# Altium PCB CellVoltageControl.PcbDoc (part 3 of 3)
Units mm, origin at the board's own origin, x right, y up, seen from the top; angles counter-clockwise.
Board outline 100.01 x 50.02 mm, 2 copper layers (Top Layer, Bottom Layer); 246 components, 111 nets, 654 pads, 146 vias.
Unrouted connection lines stored in the file: 464.
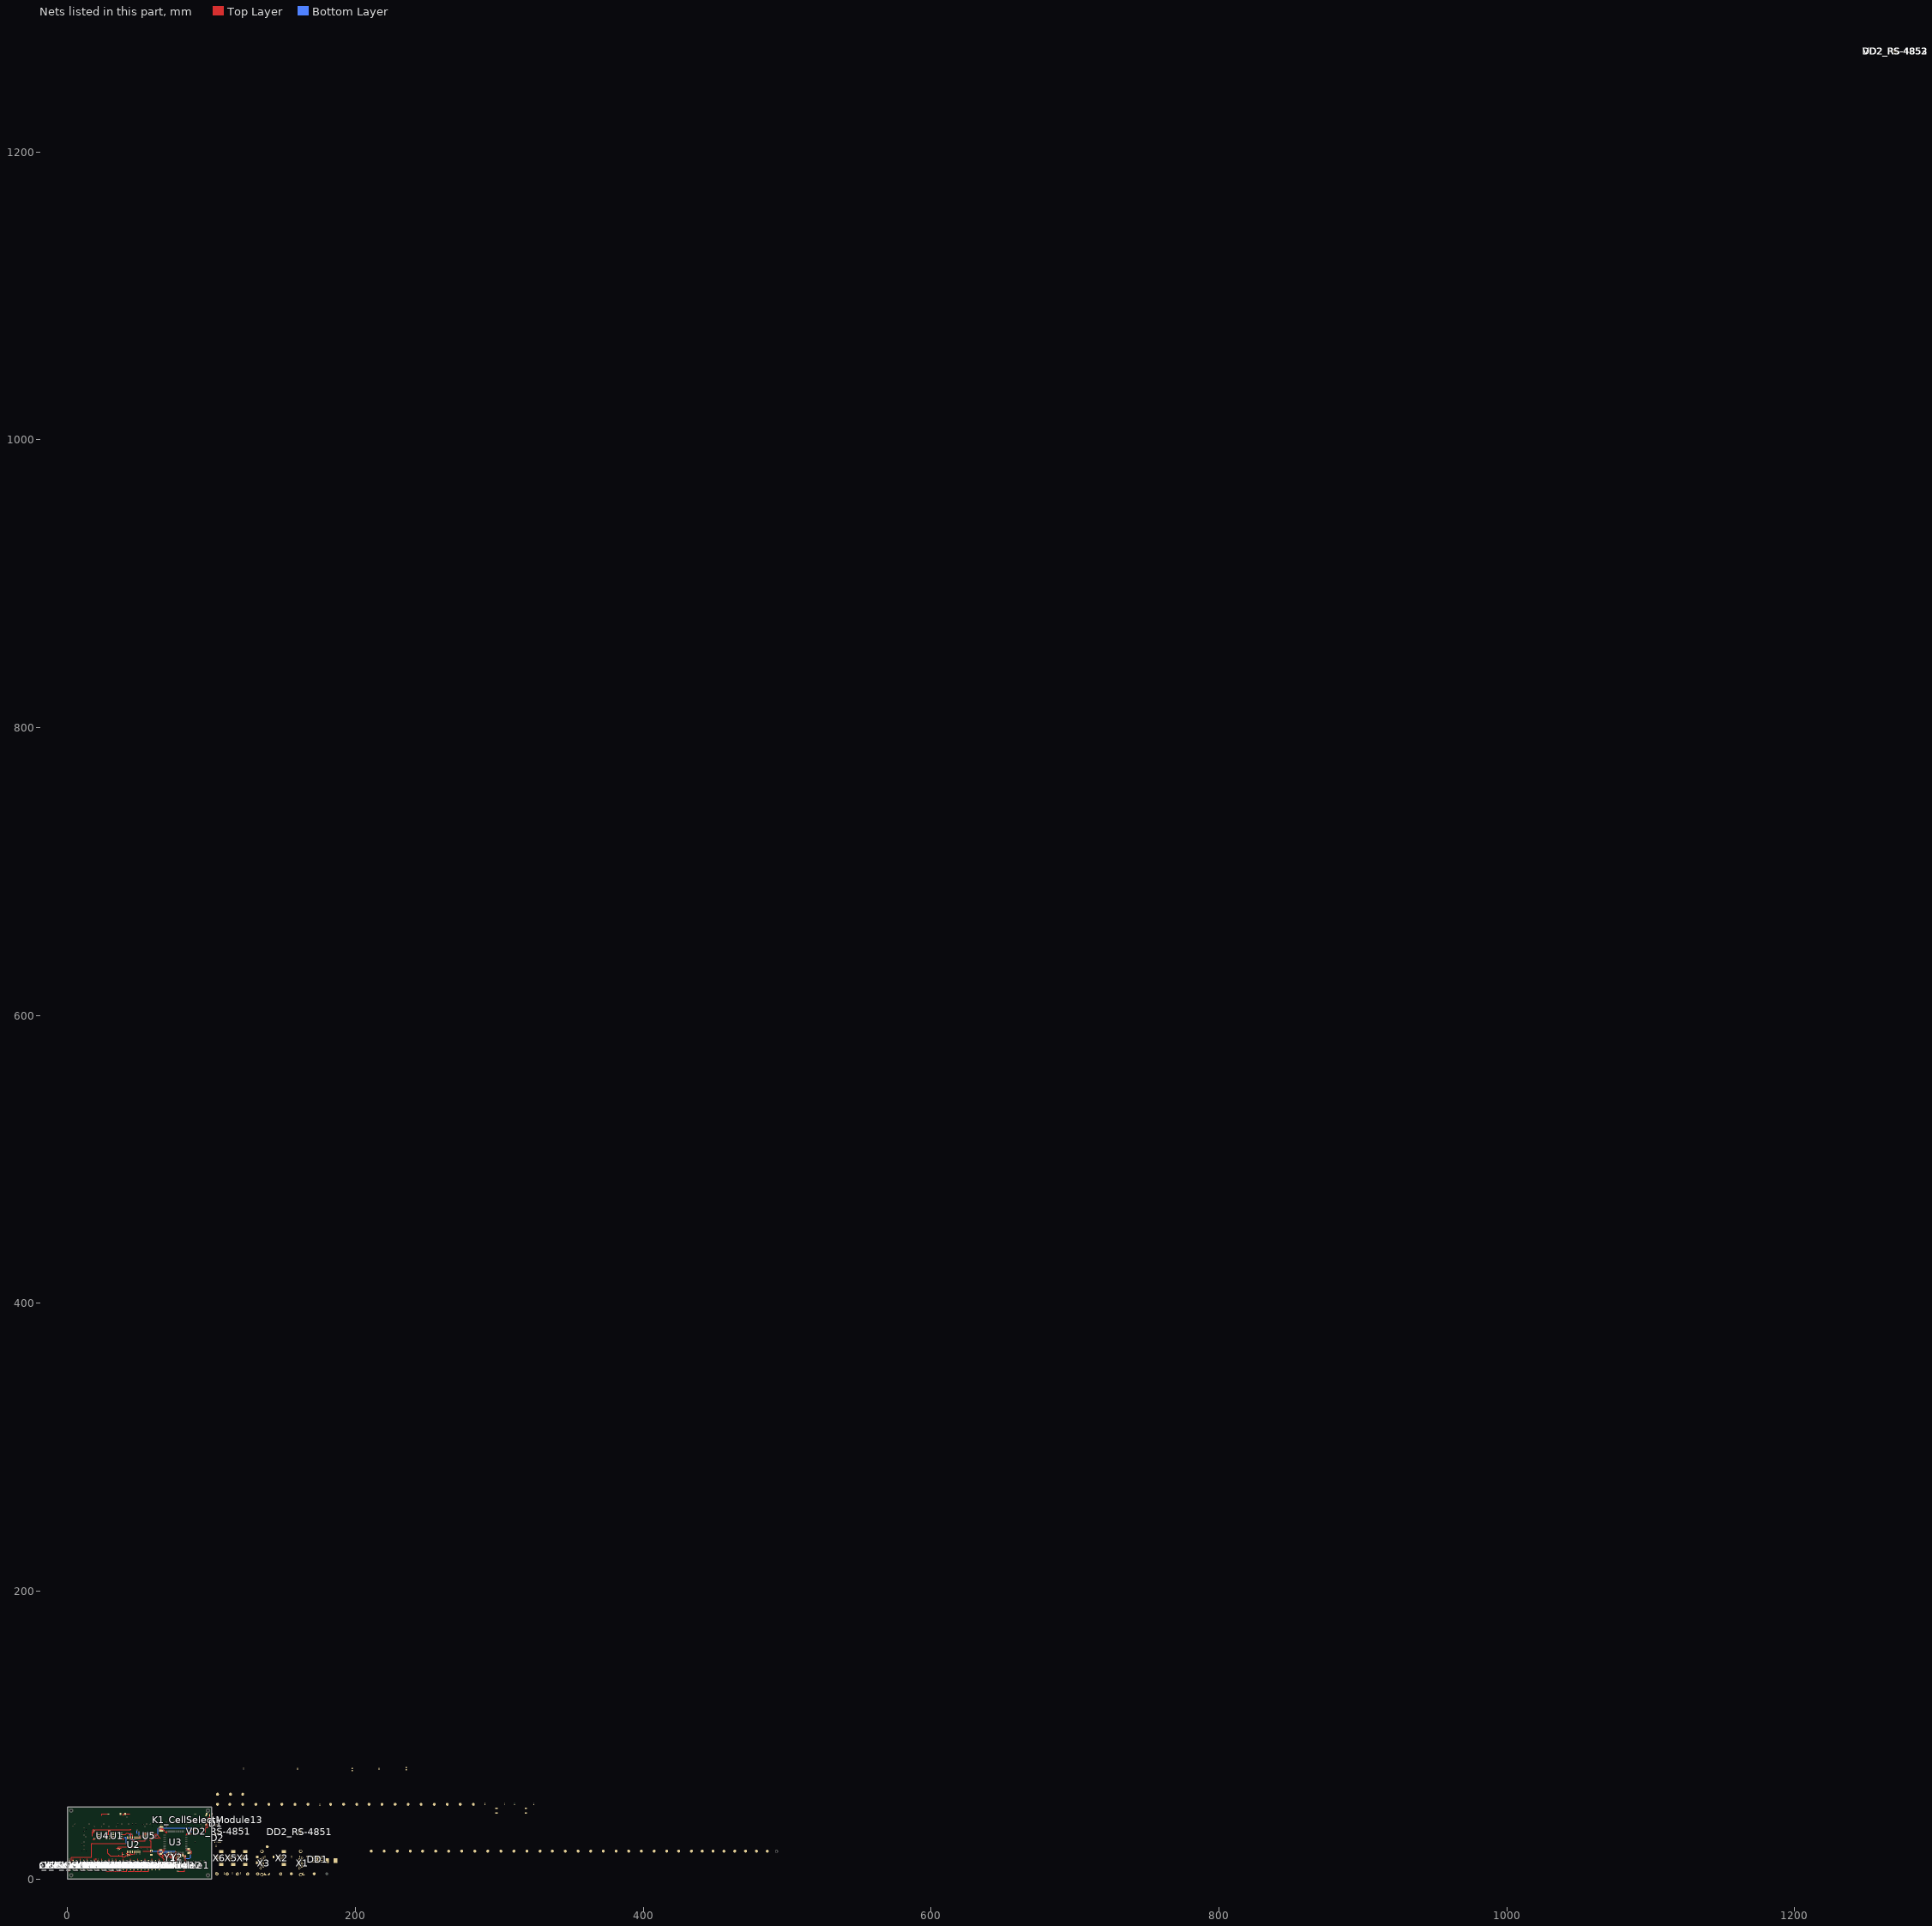
[diagram p2: the nets of this part, all layers, seen from the top]

## Via types
v1: diameter 0.61, hole 0.305, Top Layer to Bottom Layer, tented both sides, 128 vias
v2: diameter 0.6, hole 0.3, Top Layer to Bottom Layer, 18 vias

## Nets (pads, with @x,y where several pads share a name; then routed paths per layer and width w, separated by ;. In a path a pad name is that pad's centre, name@x,y a point inside that pad or via, vN(x,y) a via of type N, cw(c..) or ccw(c..) an arc to the next point about the centre after c; other vN are vias at no path point) (continued)
5V: C4.1 C5.1 C12.1 C13.1 C18.1 C19.1 D1.1 D1.3 FP2.1 L1.2 R8.1 R18.1 TP10.1 U2.1 U2.3 U2.4 | length 27.3
  Top Layer w0.2: 27.94,20.701 27.94,18.161 27.94,17.907 29.858,15.989 35.687,15.989 ; 35.687,16.637 35.687,15.989 ; 38.111,18.442 38.173,18.38 38.173,15.989 ; U2.3@43.919,18.874 43.919,17.145 ; 45.239,17.145 43.919,17.145 ; 35.687,15.989 38.173,15.989 ; 38.173,15.989 38.173,15.397 38.29,15.279 39.917,15.279 40.815,16.177 41.529,16.177 42.085,16.177 42.279,16.371 42.609,16.371 42.672,16.434 43.458,16.434 43.919,16.895 43.919,17.145
24V: C9.1 C10.1 C11.1 DD1.2 FP3.1 R7.1 TP13.1 X1.6 X3.6
cCell-1: R26_CellSelectModule13.1 R26_CellSelectModule14.1 TP15.1
cCell-2: R26_CellSelectModule11.1 R26_CellSelectModule12.1 TP12.1
cCell-3: R26_CellSelectModule9.1 R26_CellSelectModule10.1 TP11.1
cCell-4: R26_CellSelectModule7.1 R26_CellSelectModule8.1 TP8.1 | length 66.7
  Top Layer w0.2: 19.382,13.905 19.507,13.877 19.695,13.877 cw(c19.695,13.677) 19.836,13.819 19.881,13.774 cw(c19.739,13.633) 19.939,13.633 19.939,10.268 ccw(c20.139,10.268) 20.139,10.068 66.735,10.068 ccw(c66.734,10.268) 66.934,10.268 66.934,13.394 ccw(c66.734,13.394) 66.875,13.536 62.927,17.484 62.927,19.483 63.891,20.447 66.705,20.447 66.71,20.442 67.11,20.442 67.115,20.447
cCell-5: R26_CellSelectModule5.1 R26_CellSelectModule6.1 TP6.1
cCell-6: R26_CellSelectModule3.1 R26_CellSelectModule4.1 TP4.1
cCell-7: R26_CellSelectModule1.1 R26_CellSelectModule2.1 TP2.1 U5.3 | length 6.5
  Top Layer w0.2: U5.3@59.249,30.544 60.218,30.544 60.627,30.953 60.778,30.953 60.903,31.078 61.505,31.078 64.325,28.258
Cell-1: R25_CellSelectModule12.2 R25_CellSelectModule13.2 TP27.1 TP41_CellSelectModule12.1 TP41_CellSelectModule13.1 X6.3
Cell-2: R25_CellSelectModule10.2 R25_CellSelectModule11.2 TP26.1 TP41_CellSelectModule10.1 TP41_CellSelectModule11.1 X6.2
Cell-3: R25_CellSelectModule8.2 R25_CellSelectModule9.2 TP25.1 TP41_CellSelectModule8.1 TP41_CellSelectModule9.1 X6.1
Cell-4: R25_CellSelectModule6.2 R25_CellSelectModule7.2 TP24.1 TP41_CellSelectModule6.1 TP41_CellSelectModule7.1 X5.4
Cell-5: R25_CellSelectModule4.2 R25_CellSelectModule5.2 TP23.1 TP41_CellSelectModule4.1 TP41_CellSelectModule5.1 X5.3
Cell-6: R25_CellSelectModule2.2 R25_CellSelectModule3.2 TP22.1 TP41_CellSelectModule2.1 TP41_CellSelectModule3.1 X5.2
Cell-7: R25_CellSelectModule1.2 TP21.1 TP41_CellSelectModule1.1 X5.1
Cell-GND: R25_CellSelectModule14.2 TP28.1 TP41_CellSelectModule14.1 X6.4
FB: DD1.5 R8.2 R12.1
GND: C1.2 C2.2 C4.2 C5.2 C6.2 C7.2 C9.2 C10.2 C11.2 C12.2 C13.2 C14.1 C15.2 C16.2 C18.2 C19.2 C28_RS-4851.2 C28_RS-4852.2 C28_RS-4853.2 C29.2 C30.2 D1.2 D2.4 DD1.7 DD1.9 DD2_RS-4851.5 DD2_RS-4851.9 DD2_RS-4852.5 DD2_RS-4852.9 DD2_RS-4853.5 DD2_RS-4853.9 FP5.1 FP6.1 FP7.1 FP8.1 K1_CellSelectModule1.2 K1_CellSelectModule2.2 K1_CellSelectModule3.2 K1_CellSelectModule4.2 K1_CellSelectModule5.2 K1_CellSelectModule6.2 K1_CellSelectModule7.2 K1_CellSelectModule8.2 K1_CellSelectModule9.2 K1_CellSelectModule10.2 K1_CellSelectModule11.2 K1_CellSelectModule12.2 K1_CellSelectModule13.2 K1_CellSelectModule14.2 PB1.1 PB2.1 R3.2 R4.2 R10.2 R11.2 R12.2 R22_RS-4851.2 R22_RS-4852.2 R22_RS-4853.2 R24_RS-4851.2 R24_RS-4852.2 R24_RS-4853.2 R32.1 R33.1 TP17.1 TP36.1 TP37.1 U2.2 U2.6 U2.7 U2.8 VD1.AN VD2_RS-4851.3 VD2_RS-4852.3 VD2_RS-4853.3 X1.3 X2.4 X2.MP X3.3 X4.4 X4.MP Y1.2 Y2.1 Y2.4 | length 33.7
  Top Layer w0.2: 38.72,44.021 38.72,45.15 43.07,45.15 ; 40.783,17.634 v1(42.152,17.634) ; 41.529,17.572 41.529,17.097 41.532,17.094 42.102,17.094 ; v1@42.073,17.555 v1(42.152,17.634) ; U2.2@42.649,18.874 42.661,18.863 42.661,17.653 ; 64.567,35.364 64.642,35.364 64.932,35.074 65.765,35.074 65.655,35.184 65.655,35.536 C1.2@65.514,35.677 ; v1(72.517,15.113) 73.037,15.113 73.058,15.092 73.058,16.196 73.23,16.368 73.25,16.368 73.326,16.444 73.326,16.728 73.43,16.832 73.43,17.907 ; C12.2@76.7,15.706 77.394,15.706 77.73,15.37 77.73,15.346 77.986,15.09 78.01,15.09 78.228,15.309 78.228,15.721 78.283,15.775 78.283,16.285 ; C12.2@76.708,15.714 76.708,16.224 76.931,16.447 v1(76.931,16.558) 77.042,16.558 77.315,16.285 78.283,16.285 ; R33.1@76.83,5.26 81.18,5.26 81.18,6.444 ; 78.43,17.907 78.43,16.832 78.359,16.761 78.359,16.361 78.283,16.285 ; C19.2@81.777,16.256 81.777,16.216 81.798,16.216 81.915,16.099 81.915,15.363 82.106,15.172 ; 82.455,30.932 82.465,30.942 83.527,30.942 83.624,31.039 84.074,31.039 85.051,31.039 85.196,30.894 85.271,30.894 ; 42.102,17.094 42.672,17.094 42.661,17.105 42.661,17.653 ; 42.102,17.094 42.152,17.144 v1(42.152,17.634) ; v1(42.152,17.634) 42.641,17.634 42.661,17.653
  other v1: 1.151,11.04 86.152,11.06 91.186,11.049 71.189,11.141 22.484,12.433 27.462,12.423 42.404,12.433 54.924,12.453 57.307,12.443 72.34,12.453 80.01,12.446 87.343,12.453 92.452,12.443 12.358,12.464 17.315,12.464 37.477,12.474 39.951,12.464 47.483,12.464 49.815,12.474 52.44,12.474 59.901,12.474 62.335,12.474 94.946,12.464 7.289,12.504 32.389,12.494 44.929,12.494 69.887,12.514 82.684,13.31 77.037,13.371 1.11,13.766 21.192,13.857 31.187,13.857 11.186,13.917 50.269,17.271 47.748,17.355 9.881,19.396 12.786,19.406 42.579,20.485 11.344,20.595 48.967,20.601 50.919,20.727 55.375,20.737 11.386,22.974 9.839,24.342 88.646,25.527 11.303,25.654 12.592,29.32 88.646,30.48 11.334,30.509 87.249,31.75 11.281,33.182 12.797,34.361 11.334,35.477 33.667,36.408 23.659,36.429 53.693,36.411 28.755,36.439 18.706,36.51 68.734,36.494 63.703,36.578 3.695,36.592 93.74,36.599 58.672,36.692 83.728,36.725 88.681,36.756 62.414,37.95 52.373,37.981 25.004,37.998 14.956,38.029 42.425,38.033 44.951,38.023 47.477,38.023 55.013,38.033 57.425,38.012 64.951,38.033 82.44,38.034 87.449,38.014 92.456,38.031 4.979,38.039 34.982,38.039 37.529,38.039 73.728,39.393 93.723,39.411 68.734,39.499 73.66,40.386
  other v2: 172.959,12.289 174.259,12.289 172.959,13.589 174.259,13.589 172.959,14.889 174.259,14.889 161.163,32.266 160.263,32.766 162.063,32.766 161.163,33.266
HSE: TP58.1 U5.6 Y1.3 | length 2.5
  Top Layer w0.2: 74.93,17.907 74.93,16.526 75.7,15.756 75.7,15.706
I2C_SCL: TP53.1
I2C_SDA: TP52.1
ISO_5V: C3.1 C17.1 C20.1 C21.1 C22.1 C23.1 D2.7 R14.2 R16.2 TP39.1 U1.3 U2.14 U3.7 U4.3 U4.4 | length 72.2
  Top Layer w0.2: 17.275,31.862 17.275,32.514 cw(c17.475,32.514) 17.334,32.655 17.516,32.837 ccw(c17.375,32.979) 17.575,32.979 17.575,33.884 cw(c17.775,33.884) 17.775,34.084 28.663,34.084 ; 17.278,29.758 17.278,31.859 ; U4.4@21.606,28.194 21.612,27.969 ccw(c21.806,28.014) 21.665,27.873 22.151,27.387 ; 27.256,30.734 27.327,30.804 28.47,30.804 ccw(c28.47,31.004) 28.67,31.004 C21.1@28.67,33.305 ; C21.1@28.663,33.312 28.663,33.386 28.663,34.084 ; U1.3@36.76,30.734 40.069,30.734 41.1,31.765 41.552,31.765 41.593,31.806 41.627,31.773 42.086,31.773 42.343,31.515 42.697,31.515 42.736,31.476 42.754,31.459 43.914,31.459 ; 43.914,31.75 43.914,31.459 ; 43.932,34.423 43.934,34.422 ccw(c44.081,34.286) 43.918,34.402 cw(c43.302,34.839) 43.305,34.084 28.663,34.084 ; v1(51.581,29.759) 51.599,29.776 52.104,29.776 ; 52.104,29.274 52.104,29.776 ; 52.104,30.278 52.104,29.776 ; v1(55.118,28.067) 55.055,28.004 53.849,28.004 53.882,27.971 53.882,26.42 45.599,26.42 43.919,28.099 U2.14@43.919,28.624 43.919,30.001 43.914,30.007 43.914,31.459 ; 69.413,13.905 69.413,14.422 71.93,16.939 U3.7@71.93,17.907
  Bottom Layer w0.2: v1(51.581,29.759) 51.581,29.743 53.257,28.067 v1(55.118,28.067)
ISO_GND: C3.2 C17.2 C20.2 C21.2 C22.2 C23.2 C24.2 C25.2 C26.2 C27.2 D2.5 R17.2 TP32.1 TP33.1 TP34.1 TP35.1 U1.7 U2.9 U2.10 U2.11 U2.12 U2.15 U2.16 U3.4 U4.2 X5.MP X6.MP | length 30.3
  Top Layer w0.2: 17.853,27.359 18.025,27.53 18.317,27.53 ; 18.228,31.859 18.228,32.286 18.431,32.489 18.431,33.401 ; 18.258,28.143 18.258,27.672 ccw(c18.458,27.672) 18.317,27.53 ; 18.498,27.349 18.317,27.53 ; 18.498,27.349 cw(c18.356,27.208) 18.556,27.208 18.556,27 ; 29.346,30.347 29.698,30.347 cw(c29.698,30.147) 29.839,30.289 30.605,29.522 ccw(c30.747,29.664) 30.747,29.464 U1.7@31.86,29.464 ; U2.16@41.379,28.624 U2.15@42.649,28.624 ; U2.12@46.459,28.624 U2.11@47.729,28.624 U2.10@48.999,28.624 U2.9@50.269,28.624 ; 50.175,29.828 50.269,29.733 U2.9@50.269,28.624 ; 51.006,28.624 U2.9@50.269,28.624 ; 67.764,15.494 69.129,15.494 70.43,16.795 U3.4@70.43,17.907
  Bottom Layer w0.2: v1(43.053,29.972) 43.053,30.837 cw(c43.253,30.837) 43.253,31.037 44.543,31.037 ccw(c44.543,31.237) 44.684,31.095 v1(44.704,31.115) ; v1(43.688,27.178) v1(46.609,27.178) ; v1(48.258,31.318) 48.284,31.344 48.284,33.835 v1(48.26,33.858) ; v1(49.601,30.014) v1(49.601,32.723) ; v1(53.122,27.116) 53.169,27.163 54.843,27.163 v1(54.89,27.211)
LP_DE: DD2_RS-4853.2 DD2_RS-4853.3 R22_RS-4853.1 TP45.1
LP_RX: DD2_RS-4853.1 R19_RS-4853.2 TP44.1
LP_TX: DD2_RS-4853.4 TP43.1 U5.7
LSE_RTC: TP60.1 U5.2 Y2.2 | length 6.9
  Top Layer w0.2: U5.2@59.249,29.274 59.724,29.274 60.399,28.599 60.778,28.599 60.929,28.448 62.543,28.448 62.797,28.194 62.865,28.194 ; 71.694,15.384 72.43,16.12 72.43,17.907
MEAS: R5.2 R6.1 TP30.1 U1.1 | length 2.7
  Top Layer w0.2: U1.1@36.76,28.194 36.764,28.194 ccw(c36.927,28.31) 36.927,28.11 38.596,28.11 ; 38.35,28.094 38.35,27.621 ccw(c38.55,27.622) 38.55,27.422
MISO_DE: DD2_RS-4851.2 DD2_RS-4851.3 R22_RS-4851.1 TP48.1
MISO_RX: DD2_RS-4851.1 R19_RS-4851.2 TP47.1
MISO_TX: DD2_RS-4851.4 TP46.1
MOSI_DE: DD2_RS-4852.2 DD2_RS-4852.3 R22_RS-4852.1 TP51.1
MOSI_RX: DD2_RS-4852.1 R19_RS-4852.2 TP50.1
MOSI_TX: DD2_RS-4852.4 TP49.1
NetC1_1: C1.1 R3.1 X1.SH
NetC2_1: C2.1 R4.1 X3.SH
NetC8_1: C8.1 DD1.1
NetC8_2: C8.2 DD1.8 L1.1 VD1.CA
NetC14_2: C14.2 R9.2
NetC15_1: C15.1 DD1.6 R9.1
NetC24_1: C24.1 C27.1 TP40.1 U3.3 U4.5 | length 5.7
  Top Layer w0.2: 66.421,15.062 66.421,15.875 66.802,16.256 69.248,16.256 69.92,16.928 69.92,17.897 U3.3@69.93,17.907
NetC25_1: C25.1 C26.1 TP38.1 U1.8 U3.2 U3.6 | length 4.9
  Top Layer w0.2: 65.786,16.129 66.4,16.743 69.094,16.743 69.409,17.059 69.409,17.201 69.42,17.212 69.42,17.897 U3.2@69.43,17.907
NetC35_1: C35.1 C36.1 FB1.2
NetD2_1: D2.1 R15.2
NetD2_3: D2.3 R13.2
NetD2_6: D2.6 R14.1 U1.5
NetD2_8: D2.8 R16.1 U1.4 | length 5.5
  Top Layer w0.2: 23.72,44.021 23.72,45.15 R16.1@28.07,45.15
NetDD1_3: DD1.3 R7.2 R10.1
NetDD1_4: DD1.4 R11.1
NetDD2_RS-4851_6: DD2_RS-4851.6 R21_RS-4851.1
NetDD2_RS-4851_7: DD2_RS-4851.7 R23_RS-4851.1
NetDD2_RS-4852_6: DD2_RS-4852.6 R21_RS-4852.1
NetDD2_RS-4852_7: DD2_RS-4852.7 R23_RS-4852.1
NetDD2_RS-4853_6: DD2_RS-4853.6 R21_RS-4853.1
NetDD2_RS-4853_7: DD2_RS-4853.7 R23_RS-4853.1
NetFP4_1: FP4.1 TP18.1
NetK1_CellSelectModule1_1: K1_CellSelectModule1.1 R26_CellSelectModule1.2 | length 1.4
  Top Layer w0.2: K1_CellSelectModule1.1@63.714,12.439 63.714,13.887
NetK1_CellSelectModule1_4: K1_CellSelectModule1.4 R25_CellSelectModule1.1
NetK1_CellSelectModule2_1: K1_CellSelectModule2.1 R26_CellSelectModule2.2 | length 1.4
  Top Layer w0.2: K1_CellSelectModule2.1@58.726,12.45 58.726,13.899
NetK1_CellSelectModule2_4: K1_CellSelectModule2.4 R25_CellSelectModule2.1
NetK1_CellSelectModule3_1: K1_CellSelectModule3.1 R26_CellSelectModule3.2 | length 1.4
  Top Layer w0.2: K1_CellSelectModule3.1@53.726,12.45 53.726,13.899
NetK1_CellSelectModule3_4: K1_CellSelectModule3.4 R25_CellSelectModule3.1
NetK1_CellSelectModule4_1: K1_CellSelectModule4.1 R26_CellSelectModule4.2 | length 1.4
  Top Layer w0.2: K1_CellSelectModule4.1@48.726,12.45 48.726,13.899
NetK1_CellSelectModule4_4: K1_CellSelectModule4.4 R25_CellSelectModule4.1
NetK1_CellSelectModule5_1: K1_CellSelectModule5.1 R26_CellSelectModule5.2 | length 1.4
  Top Layer w0.2: K1_CellSelectModule5.1@43.72,12.444 43.72,13.893
NetK1_CellSelectModule5_4: K1_CellSelectModule5.4 R25_CellSelectModule5.1
NetK1_CellSelectModule6_1: K1_CellSelectModule6.1 R26_CellSelectModule6.2 | length 1.4
  Top Layer w0.2: K1_CellSelectModule6.1@38.72,12.444 38.72,13.893
NetK1_CellSelectModule6_4: K1_CellSelectModule6.4 R25_CellSelectModule6.1
NetK1_CellSelectModule7_1: K1_CellSelectModule7.1 R26_CellSelectModule7.2 | length 1.4
  Top Layer w0.2: K1_CellSelectModule7.1@33.72,12.444 33.72,13.893
NetK1_CellSelectModule7_4: K1_CellSelectModule7.4 R25_CellSelectModule7.1
NetK1_CellSelectModule8_1: K1_CellSelectModule8.1 R26_CellSelectModule8.2 | length 1.4
  Top Layer w0.2: K1_CellSelectModule8.1@28.72,12.444 28.72,13.893
NetK1_CellSelectModule8_4: K1_CellSelectModule8.4 R25_CellSelectModule8.1
NetK1_CellSelectModule9_1: K1_CellSelectModule9.1 R26_CellSelectModule9.2 | length 1.4
  Top Layer w0.2: K1_CellSelectModule9.1@23.72,12.444 23.72,13.893
NetK1_CellSelectModule9_4: K1_CellSelectModule9.4 R25_CellSelectModule9.1
NetK1_CellSelectModule10_1: K1_CellSelectModule10.1 R26_CellSelectModule10.2 | length 1.4
  Top Layer w0.2: K1_CellSelectModule10.1@18.72,12.444 18.72,13.893
NetK1_CellSelectModule10_4: K1_CellSelectModule10.4 R25_CellSelectModule10.1
NetK1_CellSelectModule11_1: K1_CellSelectModule11.1 R26_CellSelectModule11.2 | length 1.5
  Top Layer w0.2: K1_CellSelectModule11.1@13.72,12.444 13.732,12.456 13.732,13.905
NetK1_CellSelectModule11_4: K1_CellSelectModule11.4 R25_CellSelectModule11.1
NetK1_CellSelectModule12_1: K1_CellSelectModule12.1 R26_CellSelectModule12.2 | length 1.5
  Top Layer w0.2: K1_CellSelectModule12.1@8.72,12.444 8.732,12.456 8.732,13.905
NetK1_CellSelectModule12_4: K1_CellSelectModule12.4 R25_CellSelectModule12.1
NetK1_CellSelectModule13_1: K1_CellSelectModule13.1 R26_CellSelectModule13.2 | length 1.4
  Top Layer w0.2: 96.174,36.567 K1_CellSelectModule13.1@96.174,38.015
NetK1_CellSelectModule13_4: K1_CellSelectModule13.4 R25_CellSelectModule13.1
NetK1_CellSelectModule14_1: K1_CellSelectModule14.1 R26_CellSelectModule14.2 | length 2.9
  Top Layer w0.2: K1_CellSelectModule14.1@3.72,12.444 3.732,12.456 3.732,13.905 ; R26_CellSelectModule14.2@87.225,34.289 88.673,34.289
NetK1_CellSelectModule14_4: K1_CellSelectModule14.4 R25_CellSelectModule14.1
NetR17_1: R17.1 U2.13 | length 1.9
  Top Layer w0.2: U2.13@45.189,28.624 45.189,30.494
NetR18_2: R18.2 U2.5 | length 2
  Top Layer w0.2: 45.947,17.145 45.993,17.145 46.459,17.611 U2.5@46.459,18.874
NetU1_6: U1.6
NRST: C29.1 PB1.2 R27.2 TP61.1 U5.4 | length 25.9
  Top Layer w0.2: 52.272,19.258 56.422,19.258 ; 56.422,19.209 56.847,19.253 58.166,19.253 58.166,19.83 ; 58.166,18.491 58.167,18.492 58.167,19.252 v1(58.168,19.253) ; 75.43,17.907 75.43,18.557 v1(75.438,19.304)
  Bottom Layer w0.2: v1(58.168,19.253) v1(75.438,19.304)
RCC_MCO: TP59.1
RS-485_D+_Main: R20_RS-4853.2 R21_RS-4853.2 TP7.1 VD2_RS-4853.1 X1.5 X3.5
RS-485_D+_Servise_IN: R1.1 R20_RS-4852.2 R21_RS-4852.2 TP1.1 VD2_RS-4852.1 X1.8
RS-485_D+_Servise_Loop: TP14.1 X1.2 X3.2
RS-485_D+_Servise_OUT: R2.1 R20_RS-4851.2 R21_RS-4851.2 TP19.1 VD2_RS-4851.1 X3.8
RS-485_D-_Main: R23_RS-4853.2 R24_RS-4853.1 TP9.1 VD2_RS-4853.2 X1.4 X3.4
RS-485_D-_Servise_IN: R1.2 R23_RS-4852.2 R24_RS-4852.1 TP3.1 VD2_RS-4852.2 X1.7
RS-485_D-_Servise_Loop: TP16.1 X1.1 X3.1
RS-485_D-_Servise_OUT: R2.2 R23_RS-4851.2 R24_RS-4851.1 TP20.1 VD2_RS-4851.2 X3.7
Service_Mode: C30.1 PB2.2 R31.2 TP62.1
SYS_SWCLK: TP55.1 X2.3
SYS_SWDIO: TP54.1 X2.2
USART_RX: TP57.1 X4.3
USART_TX: TP56.1 U5.8 X4.2
V+: K1_CellSelectModule1.3 K1_CellSelectModule3.3 K1_CellSelectModule5.3 K1_CellSelectModule7.3 K1_CellSelectModule9.3 K1_CellSelectModule11.3 K1_CellSelectModule13.3 R5.1 TP29.1 TP42_CellSelectModule1.1 TP42_CellSelectModule3.1 TP42_CellSelectModule5.1 TP42_CellSelectModule7.1 TP42_CellSelectModule9.1 TP42_CellSelectModule11.1 TP42_CellSelectModule13.1 | length 95.4
  Top Layer w0.2: 1.17,5.25 1.17,6.434 1.18,6.444 1.18,7.166 cw(c1.38,7.166) 1.38,7.366 2.27,7.366 ccw(c2.27,7.566) 2.47,7.566 2.47,14.913 cw(c2.67,14.913) 2.67,15.113 16.437,15.113 ccw(c16.437,15.313) 16.637,15.313 16.637,24.311 cw(c16.837,24.311) 16.837,24.511 v1(40.386,24.511) ; 26.82,5.25 31.17,5.25 ; 31.18,5.26 K1_CellSelectModule7.3@31.18,6.444 ; 36.82,5.25 41.17,5.25 ; 41.18,5.26 K1_CellSelectModule5.3@41.18,6.444 ; 46.82,5.25 51.17,5.25 K1_CellSelectModule3.3@51.17,6.434 ; 95.812,32.405 95.812,35.487 cw(c96.012,35.487) 96.012,35.687 97.225,35.687 ccw(c97.225,35.887) 97.425,35.887 97.425,42.472 cw(c97.625,42.472) 97.625,42.672 98.52,42.672 ccw(c98.52,42.872) 98.72,42.872 K1_CellSelectModule13.3@98.72,44.021 98.72,45.15
  Bottom Layer w0.2: 39.202,28.872 40.186,28.872 cw(c40.186,28.672) 40.386,28.672 v1(40.386,24.511)
  other v1: 41.148,42.862
V-: K1_CellSelectModule2.3 K1_CellSelectModule4.3 K1_CellSelectModule6.3 K1_CellSelectModule8.3 K1_CellSelectModule10.3 K1_CellSelectModule12.3 K1_CellSelectModule14.3 R6.2 TP31.1 TP42_CellSelectModule2.1 TP42_CellSelectModule4.1 TP42_CellSelectModule6.1 TP42_CellSelectModule8.1 TP42_CellSelectModule10.1 TP42_CellSelectModule12.1 TP42_CellSelectModule14.1 U1.2 | length 16.6
  Top Layer w0.2: 31.82,5.25 36.17,5.25 ; 36.18,5.26 K1_CellSelectModule6.3@36.18,6.444 ; 41.82,5.25 46.17,5.25 46.17,6.434 K1_CellSelectModule4.3@46.18,6.444 ; 51.825,5.255 56.175,5.255 ; 56.17,5.25 K1_CellSelectModule2.3@56.17,6.434
VDD_1: C31.1 C32.1 R28.1 R30.2 U5.1 | length 147.6
  Top Layer w0.2: 34.036,21.209 35.176,21.209 35.181,21.214 35.181,21.898 cw(c35.381,21.898) 35.381,22.098 58.127,22.089 ; C32.1@35.181,21.057 35.366,21.242 37.161,21.242 ; 57.531,26.416 57.661,26.416 57.928,26.416 ; 57.531,26.55 57.531,27.73 cw(c57.731,27.73) 57.589,27.871 v1(57.785,28.067) 57.848,28.004 U5.1@59.249,28.004 ; 57.928,26.416 cw(c57.927,26.216) 58.127,26.216 58.127,22.089 ; 58.127,21.064 58.127,22.089 ; 60.903,29.274 60.903,29.776 ; 60.903,30.278 60.903,29.776 ; v1(61.595,29.845) 61.526,29.776 60.903,29.776 ; v1(62.89,35.263) 63.682,34.471 ccw(c63.822,34.614) 63.821,34.414 64.567,34.414 65.765,34.414 66.088,34.414 cw(c66.088,34.214) 66.229,34.355 68.51,32.074 ccw(c68.652,32.215) 68.793,32.073 68.862,32.142 ccw(c68.72,32.283) 68.92,32.28 68.93,32.956 ; v1(63.627,18.161) 63.66,18.194 64.589,18.194 65.717,18.194 65.786,18.263 65.862,18.339 66.143,18.339 66.35,18.546 66.35,19.315 66.467,19.432 67.405,19.432 ; 71.12,15.24 71.12,15.014 71.352,14.782 71.802,14.782 72.146,14.438 73.874,14.438 74.008,14.572 74.008,15.092 v1@74.782,15.092 ; 73.93,17.907 73.92,17.897 73.92,15.258 74.008,15.17 ; v1(74.788,15.083) 74.788,14.62 75.002,14.406 75.7,14.406 ; 75.714,14.419 75.859,14.419 ; 76.686,14.419 75.859,14.419 ; 79.43,17.907 79.43,16.836 79.987,16.279 81.153,16.279 81.169,16.263 81.169,15.188 81.153,15.172 v1(81.153,14.224) 81.734,14.224 cw(c81.734,14.024) 81.934,14.024 81.934,10.668 cw(c81.734,10.668) 81.734,10.468 75.626,10.468 cw(c75.626,10.668) 75.426,10.668 75.426,13.108 cw(c75.626,13.108) 75.466,13.228 cw(c75.626,13.108) 75.484,13.249 75.692,13.457 75.692,14.253 75.859,14.419 ; 82.455,20.432 82.465,20.422 83.382,20.422 83.532,20.272 83.532,20.229 84.023,19.738 ; 82.455,31.432 83.375,31.432 83.642,31.699 84.074,31.699 85.051,31.699 85.196,31.844 85.271,31.844 85.471,31.866 v1(86.062,31.866) ; 84.003,19.738 84.023,19.738 ; v1(85.315,17.154) 85.96,17.799 85.96,18.942 85.753,19.149 85.2,19.149 85.2,19.62 85.083,19.738 84.023,19.738
  Bottom Layer w0.2: v1(57.785,28.067) 59.817,28.067 v1(61.595,29.845) 62.837,31.087 ccw(c62.695,31.228) 62.855,31.108 ccw(c62.695,31.228) 62.895,31.228 62.895,35.106 cw(c63.095,35.106) 63.095,35.306 85.862,35.306 cw(c85.862,35.106) 86.062,35.106 86.062,32.571 v1(86.062,31.866) ; 63.119,17.653 v1(63.627,18.161) 71.71,18.161 v1(74.788,15.083) ; v1(81.153,14.224) 84.67,14.224 85.315,14.869 v1(85.315,17.154)
VDD_2: C33.1 C34.1 R29.1
VDDA: FB1.1 R30.1 U5.5 | length 2.8
  Top Layer w0.2: 52.849,31.195 52.852,31.198 53.796,31.198 ; U5.5@53.849,31.814 53.849,31.25 53.796,31.198 ; 54.991,31.115 54.823,31.115 54.74,31.198 53.796,31.198
VSS_1: C31.2 C32.2 C35.2 C36.2 R32.2
VSS_2: C33.2 C34.2 R33.2
pads on no net: D1.4 U3.1 U3.5 U3.8 U3.9 U3.10 U3.11 U3.12 U3.13 U3.14 U3.15 U3.16 U3.17 U3.18 U3.19 U3.20 U3.21 U3.22 U3.23 U3.24 U3.25 U3.26 U3.27 U3.28 U3.29 U3.30 U3.31 U3.32 U3.33 U3.34 U3.35 U3.36 U3.37 U3.38 U3.39 U3.40 U3.41 U3.42 U3.43 U3.44 U3.45 U3.46 U3.47 U3.48 U3.49 U3.50 U3.51 U3.52 U3.53 U3.54 U3.55 U3.56 U3.57 U3.58 U3.59 U3.60 U3.61 U3.62 U3.63 U3.64 U3.65 U3.66 U3.67 U3.68 U3.69 U3.70 U3.71 U3.72 U3.73 U3.74 U3.75 U3.76 U3.77 U3.78 U3.79 U3.80 U3.81 U3.82 U3.83 U3.84 U3.85 U3.86 U3.87 U3.88 U3.89 U3.90 U3.91 U3.92 U3.93 U3.94 U3.95 U3.96 U3.97 U3.98 U3.99 U3.100 U4.1 U4.6 U4.7 U4.8 X1.MP X3.MP
copper on no net: | length 2649.8
  Top Layer w0.2: 1.174,36.567 1.174,38.015 ; 1.82,5.25 6.17,5.25 6.17,6.434 ; 2.471,45.091 ccw(c2.613,44.95) 2.453,45.07 ccw(c2.613,44.95) 2.413,44.95 2.413,34.534 ccw(c2.613,34.534) 2.613,34.334 4.191,34.334 ; 2.471,45.091 2.53,45.15 3.07,45.15 ; 3.72,44.021 3.72,45.15 8.07,45.15 ; 4.189,19.334 5.335,19.334 ; 4.189,19.984 4.189,24.334 5.335,24.334 ; 4.189,24.984 4.189,29.334 5.335,29.334 ; 4.189,29.984 4.189,34.332 4.191,34.334 ; 4.382,13.905 4.507,13.884 4.702,13.884 cw(c4.702,13.684) 4.843,13.826 4.895,13.774 cw(c4.753,13.633) 4.953,13.633 4.953,8.852 ccw(c5.153,8.852) 5.153,8.652 90.227,8.652 ccw(c90.226,8.852) 90.426,8.852 90.426,11.841 cw(c90.78,11.844) 90.426,11.844 90.426,13.044 cw(c90.78,13.044) 90.426,13.047 ccw(c90.226,13.049) 90.426,13.049 90.426,13.416 cw(c90.626,13.416) 90.466,13.536 cw(c90.626,13.416) 90.484,13.557 91.412,14.485 ccw(c91.271,14.626) 91.471,14.626 91.471,34.924 ccw(c91.271,34.924) 91.271,35.124 79.925,35.124 ccw(c79.925,34.924) 79.805,35.084 ccw(c79.925,34.924) 79.784,35.066 ; 4.699,41.765 74.73,41.765 cw(c74.73,41.565) 74.93,41.565 74.93,32.957 ; 5.335,34.334 4.191,34.334 ; 6.174,36.567 6.174,38.015 ; 6.815,5.245 11.165,5.245 ; 6.847,36.567 6.981,36.611 7.144,36.611 ccw(c7.144,36.811) 7.285,36.669 7.313,36.697 ccw(c7.171,36.838) 7.371,36.838 7.371,41.071 cw(c7.571,41.071) 7.43,41.212 7.471,41.253 cw(c7.612,41.111) 7.612,41.311 72.767,41.311 cw(c72.766,41.111) 72.966,41.111 72.966,37.22 ccw(c73.166,37.221) 73.024,37.081 74.363,35.741 cw(c74.222,35.6) 74.382,35.72 cw(c74.222,35.6) 74.422,35.6 74.422,32.965 74.43,32.957 ; 8.72,44.021 8.72,45.15 13.07,45.15 ; 9.382,13.905 9.507,13.86 9.679,13.86 cw(c9.679,13.66) 9.82,13.802 9.848,13.774 cw(c9.706,13.633) 9.906,13.633 9.906,9.306 ccw(c10.106,9.306) 10.106,9.106 89.771,9.106 ccw(c89.77,9.306) 89.97,9.306 89.97,13.628 cw(c90.17,13.628) 90.01,13.748 cw(c90.17,13.628) 90.028,13.769 90.958,14.699 ccw(c90.817,14.84) 91.017,14.84 91.017,33.32 ccw(c90.817,33.32) 91.016,33.323 ccw(c90.817,33.32) 90.817,33.52 86.559,33.52 cw(c86.559,33.72) 86.418,33.578 85.78,34.216 80.317,34.216 79.94,33.839 79.94,32.967 79.93,32.957 ; 11.17,5.25 11.17,6.434 ; 11.174,36.567 11.174,38.015 ; 11.329,16.8 12.777,16.8 ; 11.34,21.788 12.789,21.788 ; 11.34,26.788 12.789,26.788 ; 11.34,31.788 12.789,31.788 ; 11.815,5.245 16.165,5.245 ; 11.847,36.567 12.351,36.567 12.41,36.625 ccw(c12.268,36.767) 12.428,36.647 ccw(c12.268,36.767) 12.468,36.767 12.468,40.657 cw(c12.668,40.657) 12.668,40.857 72.312,40.857 cw(c72.312,40.657) 72.512,40.657 72.512,36.994 ccw(c72.712,36.995) 72.57,36.855 73.871,35.553 cw(c73.73,35.412) 73.89,35.532 cw(c73.73,35.412) 73.93,35.412 73.93,32.957 ; v1@13.208,31.115 13.429,31.336 13.429,31.764 ; v1(13.311,27.432) 13.37,27.373 13.37,26.823 13.429,26.764 ; v1(13.335,17.399) 13.429,17.305 13.429,16.764 ; v1(13.335,21.082) 13.429,21.176 13.429,21.764 ; 13.72,44.021 13.72,45.15 18.07,45.15 ; 14.382,13.905 14.886,13.905 14.944,13.846 cw(c14.803,13.705) 15.003,13.705 15.003,9.76 ccw(c15.203,9.76) 15.203,9.56 89.317,9.56 ccw(c89.316,9.76) 89.516,9.76 89.516,13.826 cw(c89.716,13.826) 89.556,13.946 cw(c89.716,13.826) 89.574,13.967 90.504,14.897 ccw(c90.363,15.038) 90.563,15.038 90.563,32.815 ccw(c90.363,32.815) 90.363,33.015 80.93,33.015 80.93,32.957 ; 16.175,5.255 16.175,6.439 ; 16.186,36.578 16.186,38.027 ; 16.815,5.245 21.165,5.245 ; 16.847,36.567 16.981,36.595 17.161,36.595 ccw(c17.161,36.795) 17.302,36.653 17.346,36.697 ccw(c17.204,36.838) 17.404,36.838 17.404,40.182 cw(c17.604,40.182) 17.463,40.323 17.485,40.345 cw(c17.626,40.203) 17.626,40.403 71.858,40.403 cw(c71.858,40.203) 72.058,40.203 72.058,36.736 ccw(c72.258,36.737) 72.116,36.596 73.371,35.341 cw(c73.23,35.199) 73.39,35.319 cw(c73.23,35.199) 73.43,35.199 73.43,32.957 ; 18.72,44.021 18.72,45.15 23.07,45.15 ; 19.178,29.758 19.193,29.743 19.193,28.158 19.208,28.143 19.186,28.121 19.186,27.021 19.165,27 19.431,27 19.698,27 20.13,27 ; 21.175,5.255 21.175,6.439 ; 21.174,36.567 21.174,38.015 ; 21.606,27 20.13,27 ; 21.606,29.464 20.881,29.464 20.329,29.464 ccw(c20.33,29.264) 20.13,29.264 20.13,27 ; 21.82,5.25 26.17,5.25 ; 21.847,36.567 21.981,36.598 22.157,36.598 ccw(c22.157,36.798) 22.357,36.798 22.357,39.749 cw(c22.557,39.749) 22.557,39.949 67.642,39.949 cw(c67.642,39.749) 67.842,39.749 67.842,36 ccw(c68.042,36) 67.901,35.858 68.199,35.56 71.374,35.56 72.43,34.504 72.43,32.957 ; 21.858,30.734 23.793,30.734 cw(c23.793,30.534) 23.913,30.694 cw(c23.793,30.534) 23.934,30.676 25.088,29.522 ccw(c25.229,29.664) 25.109,29.504 ccw(c25.229,29.664) 25.229,29.464 27.256,29.464 29.309,29.464 29.346,29.427 29.274,29.356 29.274,28.321 30.698,28.321 30.825,28.194 31.86,28.194 31.877,28.177 31.877,27 ; 22.86,18.161 22.86,20.701 ; 24.382,13.905 24.507,13.874 24.692,13.874 cw(c24.692,13.674) 24.892,13.674 24.892,10.722 ccw(c25.092,10.722) 25.092,10.522 65.212,10.522 ccw(c65.212,10.722) 65.412,10.722 65.412,14.274 ccw(c65.212,14.274) 65.353,14.416 62.473,17.296 62.473,19.671 63.713,20.911 66.699,20.911 66.71,20.922 67.123,20.922 67.134,20.911 ; 25.4,18.161 25.4,20.701 ; 26.175,5.255 26.175,6.439 ; 26.174,36.567 26.174,38.015 ; 26.847,36.567 26.981,36.642 27.11,36.642 ccw(c27.11,36.842) 27.31,36.842 27.31,39.293 cw(c27.51,39.293) 27.369,39.434 27.372,39.437 cw(c27.513,39.295) 27.513,39.495 67.188,39.495 cw(c67.188,39.295) 67.388,39.295 67.388,35.812 ccw(c67.588,35.812) 67.447,35.67 68.065,35.052 71.24,35.052 71.93,34.362 71.93,32.957 ; 28.72,44.021 28.72,45.15 33.07,45.15 ; 29.399,13.905 29.474,13.83 29.474,11.236 ccw(c29.674,11.236) 29.674,11.036 64.728,11.036 ccw(c64.728,11.236) 64.928,11.236 64.928,14.116 ccw(c64.728,14.116) 64.869,14.257 62.019,17.108 62.019,19.859 63.571,21.411 66.699,21.411 66.71,21.422 67.162,21.422 67.174,21.411 ; 31.174,36.567 31.174,38.015 ; 31.847,36.567 32.339,36.567 32.397,36.625 ccw(c32.256,36.767) 32.416,36.647 ccw(c32.256,36.767) 32.456,36.767 32.456,38.841 cw(c32.656,38.841) 32.656,39.041 66.735,39.041 cw(c66.734,38.841) 66.934,38.841 66.934,35.624 ccw(c67.134,35.624) 66.993,35.482 67.931,34.544 71.106,34.544 71.43,34.22 71.43,32.957 ; 31.86,30.734 30.363,30.734 cw(c30.363,30.934) 30.163,30.934 30.163,32.158 cw(c30.363,32.158) 30.203,32.278 cw(c30.363,32.158) 30.222,32.299 31.034,33.111 cw(c31.175,32.969) 31.175,33.169 48.035,33.169 cw(c48.035,32.969) 48.176,33.111 50.209,31.078 50.927,31.078 ; 31.86,32.004 33.572,32.004 ccw(c33.572,32.204) 33.692,32.044 ccw(c33.572,32.204) 33.713,32.062 34.306,32.655 ; 33.72,44.021 33.72,45.15 38.07,45.15 ; 34.306,32.655 cw(c34.447,32.513) 34.327,32.673 cw(c34.447,32.513) 34.447,32.713 47.625,32.713 ; 34.382,13.905 35.053,13.905 cw(c35.053,13.705) 35.253,13.705 35.253,11.69 ccw(c35.453,11.69) 35.453,11.49 64.274,11.49 ccw(c64.274,11.69) 64.474,11.69 64.474,13.928 ccw(c64.274,13.928) 64.415,14.069 61.565,16.92 61.565,20.156 63.341,21.932 66.86,21.932 ; 36.856,36.572 39.672,36.572 cw(c39.672,36.372) 39.792,36.532 cw(c39.672,36.372) 39.813,36.514 40.836,35.491 ccw(c40.977,35.633) 40.975,35.433 48.177,35.433 cw(c48.177,35.233) 48.297,35.393 cw(c48.177,35.233) 48.318,35.375 49.472,34.221 ccw(c49.613,34.363) 49.493,34.203 ccw(c49.613,34.363) 49.613,34.163 59.436,34.163 65.667,27.932 67.405,27.932 ; 39.281,28.086 39.281,28.874 ; 39.382,13.905 42.831,13.905 44.928,16.002 57.999,16.002 58.841,16.844 58.841,25.992 cw(c59.041,25.992) 58.881,26.112 cw(c59.041,25.992) 58.899,26.133 60.14,27.374 cw(c60.281,27.232) 60.161,27.392 cw(c60.281,27.232) 60.281,27.432 67.405,27.432 ; 40.894,30.734 40.976,30.816 42.736,30.816 ; 41.186,36.578 41.186,38.027 ; 41.856,36.572 42.212,36.572 cw(c42.212,36.372) 42.353,36.514 42.868,35.999 ccw(c43.009,36.141) 43.009,35.941 48.319,35.941 cw(c48.319,35.741) 48.439,35.901 cw(c48.319,35.741) 48.46,35.883 49.668,34.675 ccw(c49.809,34.817) 49.689,34.657 ccw(c49.809,34.817) 49.809,34.617 59.624,34.617 65.809,28.432 67.405,28.432 ; 43.72,44.021 43.72,45.15 48.07,45.15 ; 44.382,13.905 47.477,13.905 ccw(c47.477,14.105) 47.597,13.945 ccw(c47.477,14.105) 47.618,13.963 49.091,15.436 cw(c49.232,15.294) 49.112,15.454 cw(c49.232,15.294) 49.232,15.494 58.133,15.494 59.295,16.656 59.295,25.684 cw(c59.495,25.684) 59.335,25.804 cw(c59.495,25.684) 59.353,25.825 60.402,26.874 cw(c60.543,26.732) 60.423,26.892 cw(c60.543,26.732) 60.543,26.932 67.405,26.932 ; 46.174,36.567 46.174,38.015 ; 46.856,36.572 48.355,36.572 cw(c48.355,36.372) 48.475,36.532 cw(c48.355,36.372) 48.496,36.514 49.88,35.129 ccw(c50.022,35.271) 49.902,35.111 ccw(c50.022,35.271) 50.022,35.071 59.812,35.071 65.951,28.932 67.405,28.932 ; 47.625,32.004 47.625,32.713 ; 48.72,44.021 48.72,45.15 53.07,45.15 ; 49.382,13.905 52.932,13.905 53.96,14.932 58.213,14.932 59.749,16.468 59.749,25.376 cw(c59.949,25.376) 59.789,25.496 cw(c59.949,25.376) 59.807,25.517 60.664,26.374 cw(c60.805,26.232) 60.685,26.392 cw(c60.805,26.232) 60.805,26.432 67.405,26.432 ; 50.535,36.561 50.606,36.486 50.606,35.725 ccw(c50.806,35.725) 50.806,35.525 59.917,35.525 cw(c59.917,35.325) 60.059,35.466 66.093,29.432 67.405,29.432 ; 50.927,31.877 50.927,31.078 ; 51.174,36.567 51.174,38.015 ; 53.253,24.511 54.503,24.511 55.753,24.511 57.003,24.511 57.618,24.511 57.67,24.459 ; 53.72,44.021 53.72,45.085 ; 53.72,45.15 58.07,45.15 ; 53.849,29.274 53.649,29.074 53.008,29.074 52.493,28.559 52.189,28.559 52.104,28.474 51.979,28.599 51.673,28.599 50.923,29.348 50.923,29.639 ccw(c50.723,29.639) 50.865,29.78 50.495,30.15 47.966,32.658 ccw(c47.825,32.515) 47.823,32.715 47.625,32.713 ; 53.849,30.544 52.789,30.544 52.379,30.953 52.229,30.953 52.104,31.078 50.927,31.078 ; 54.483,13.905 57.828,13.905 60.203,16.28 60.203,25.068 cw(c60.403,25.068) 60.243,25.188 cw(c60.403,25.068) 60.261,25.209 60.926,25.874 cw(c61.067,25.732) 60.947,25.892 cw(c61.067,25.732) 61.067,25.932 67.405,25.932 ; 55.535,36.561 55.535,36.179 ccw(c55.735,36.179) 55.735,35.979 60.105,35.979 cw(c60.105,35.779) 60.247,35.92 66.235,29.932 67.405,29.932 ; 56.174,36.567 56.174,38.015 ; 56.825,5.255 61.175,5.255 61.175,6.439 ; 57.67,23.634 57.67,24.459 ; 57.67,25.285 57.67,24.459 ; 58.72,44.021 58.72,45.15 63.07,45.15 ; 59.38,13.905 60.133,13.905 60.657,14.429 60.657,24.76 cw(c60.857,24.76) 60.697,24.88 cw(c60.857,24.76) 60.715,24.901 61.188,25.374 cw(c61.329,25.232) 61.209,25.392 cw(c61.329,25.232) 61.329,25.432 67.405,25.432 ; 60.535,36.561 60.606,36.49 60.606,36.203 66.377,30.432 67.405,30.432 ; 61.186,36.578 61.186,38.027 ; 61.825,5.255 66.175,5.255 66.175,6.439 ; 62.484,24.765 62.595,24.765 62.762,24.932 67.405,24.932 ; 63.061,13.874 61.564,13.874 61.111,14.327 61.111,20.725 64.318,23.932 67.405,23.932 ; 63.662,24.257 63.844,24.439 67.398,24.439 ; 63.72,44.021 63.72,45.15 68.07,45.15 ; v1(64.643,23.273) 64.754,23.273 64.913,23.432 67.405,23.432 ; v1(65.367,22.773) 65.426,22.832 65.972,22.832 66.072,22.932 67.405,22.932 ; 65.535,36.561 65.606,36.49 65.606,36.227 67.747,34.086 70.866,34.086 70.92,34.032 70.92,32.967 70.93,32.957 ; 65.645,33.274 65.665,33.254 ccw(c65.806,33.396) 65.806,33.196 66.245,33.196 cw(c66.245,32.996) 66.445,32.996 66.445,31.707 66.71,31.442 67.021,31.442 67.405,31.432 ; 65.659,32.131 65.737,32.053 65.737,31.772 66.568,30.942 67.395,30.942 67.405,30.932 ; 65.844,17.197 68.22,17.197 68.93,17.907 ; 66.174,36.567 66.174,38.015 ; 66.18,12.444 66.181,12.443 v1(66.181,11.171) ; 66.83,5.26 71.18,5.26 ; 67.531,14.365 67.599,14.434 68.71,14.434 70.93,16.653 70.93,17.907 ; 68.72,44.021 68.72,45.15 73.07,45.15 ; 68.726,12.45 68.726,13.899 ; v1(68.969,31.354) 69.23,31.354 ccw(c69.23,31.554) 69.43,31.554 69.43,32.957 ; v1(70.358,31.496) 70.43,31.568 70.43,32.957 ; 70.535,36.561 70.606,36.49 70.606,36.239 70.831,36.014 71.599,36.014 cw(c71.599,35.814) 71.719,35.974 cw(c71.599,35.814) 71.74,35.956 72.872,34.824 cw(c72.73,34.683) 72.89,34.803 cw(c72.73,34.683) 72.93,34.683 72.93,32.957 ; 71.175,5.255 71.175,6.439 ; 71.174,36.567 71.174,38.015 ; 71.83,5.26 76.18,5.26 76.18,6.444 ; 73.72,44.021 73.72,45.15 78.07,45.15 ; 73.726,12.45 73.726,13.899 ; 74.366,13.905 74.491,13.905 74.657,13.905 cw(c74.657,13.705) 74.857,13.705 74.857,10.214 ccw(c75.057,10.214) 75.057,10.014 85.226,10.014 ccw(c85.226,10.214) 85.426,10.214 85.426,13.108 cw(c85.626,13.108) 85.466,13.228 cw(c85.626,13.108) 85.484,13.249 85.633,13.398 87.602,15.367 88.78,15.367 89.621,16.208 89.621,18.748 89.621,19.841 88.86,20.602 88.319,20.602 87.016,21.905 86.353,21.905 84.483,21.905 83.956,22.432 82.455,22.432 ; 75.43,32.957 75.43,36.486 75.505,36.561 75.535,36.561 ; 75.93,32.957 75.93,35.087 76.934,36.091 76.934,37.415 76.934,37.419 ccw(c76.58,37.421) 76.934,37.421 76.934,38.621 ccw(c76.58,38.621) 76.934,38.625 cw(c77.134,38.627) 76.934,38.627 76.934,41.964 cw(c77.134,41.964) 77.134,42.164 94.796,42.164 cw(c94.796,41.964) 94.996,41.964 94.996,36.761 ccw(c95.196,36.761) 95.195,36.561 95.41,36.561 95.535,36.561 ; 76.174,36.567 76.174,38.015 ; 76.43,32.957 76.43,34.945 77.329,35.845 ccw(c77.188,35.986) 77.388,35.985 77.388,36.09 ccw(c76.934,36.091) 77.388,36.093 77.388,38.621 ccw(c76.58,38.621) 77.388,38.623 77.388,40.725 77.388,41.057 77.389,41.51 cw(c77.589,41.51) 77.589,41.71 89.716,41.71 cw(c89.716,41.51) 89.916,41.511 ; 76.93,32.957 76.93,34.794 77.783,35.648 ccw(c77.642,35.789) 77.842,35.788 77.842,36.09 77.842,41.056 cw(c78.042,41.056) 77.901,41.197 cw(c78.042,41.056) 78.042,41.256 84.763,41.256 cw(c84.763,41.056) 84.963,41.057 84.963,36.761 ccw(c85.163,36.761) 85.162,36.561 85.41,36.561 85.535,36.561 ; 77.43,32.957 77.43,34.652 79.339,36.561 80.535,36.561 ; 77.93,32.957 77.93,34.496 79.407,35.973 ; 78.061,13.874 78.061,13.418 77.655,13.012 ccw(c77.797,12.871) 77.637,12.991 ccw(c77.797,12.871) 77.597,12.871 77.597,11.122 ccw(c77.797,11.122) 77.797,10.922 79.611,10.922 ccw(c79.611,11.122) 79.714,10.95 v1(80.01,11.127) ; 78.43,32.957 78.432,32.959 78.432,34.356 79.595,35.519 ; 78.72,44.021 78.72,45.15 83.07,45.15 ; 78.726,12.45 78.726,13.899 ; 78.93,17.907 78.936,17.9 78.936,16.292 78.943,16.285 78.943,15.109 78.962,15.09 79.218,14.834 79.386,14.834 80.264,13.956 ; 78.93,32.957 78.938,32.965 78.938,34.219 79.783,35.065 ; 79.408,35.974 cw(c79.549,35.832) 79.429,35.992 cw(c79.549,35.832) 79.549,36.032 92.179,36.032 cw(c92.179,35.832) 92.379,35.832 92.379,14.636 ccw(c92.579,14.636) 92.579,14.436 96.012,14.436 ; 79.43,32.957 79.43,34.07 80.03,34.67 86.177,34.67 86.522,34.325 86.572,34.325 ; 79.596,35.52 cw(c79.737,35.378) 79.617,35.538 cw(c79.737,35.378) 79.737,35.578 91.726,35.578 cw(c91.725,35.378) 91.925,35.378 91.925,14.074 ccw(c92.125,14.074) 92.125,13.874 93.061,13.874 ; 79.93,17.907 79.94,17.897 79.94,17.07 80.27,16.74 82.017,16.74 82.231,16.526 82.231,16.522 83.329,15.424 83.329,15.003 83.346,14.986 ; 80.43,17.907 80.44,17.917 80.44,18.744 80.797,19.101 81.361,19.101 84.455,16.007 ; 80.43,32.957 80.44,32.947 80.44,32.262 80.451,32.251 80.451,32.109 80.732,31.828 81.128,31.828 81.8,32.5 ; 80.93,17.907 81.488,17.907 82.208,17.187 82.211,17.187 82.685,16.714 82.685,16.71 84.455,14.94 ; v1(81.026,28.448) 81.034,28.44 82.447,28.44 82.455,28.432 ; v1(81.026,29.464) 81.058,29.432 82.455,29.432 ; 81.186,36.578 81.186,38.027 ; 81.801,32.5 cw(c81.941,32.358) 81.821,32.518 cw(c81.941,32.358) 81.941,32.558 89.909,32.558 cw(c89.909,32.358) 90.109,32.361 cw(c89.909,32.358) 90.109,32.358 90.109,15.261 cw(c89.909,15.261) 90.069,15.141 cw(c89.909,15.261) 90.05,15.12 89.537,14.607 cw(c89.396,14.749) 89.516,14.589 cw(c89.396,14.749) 89.396,14.549 88.726,14.549 ; 81.83,5.26 86.18,5.26 86.18,6.444 ; 82.455,20.932 83.53,20.932 84.098,20.364 86.062,20.364 86.224,20.202 86.224,19.588 86.414,19.398 86.414,15.492 86.224,15.302 84.827,13.905 84.328,13.905 ; 82.455,21.432 83.672,21.432 84.257,20.847 86.524,20.847 86.678,20.693 86.678,19.777 86.868,19.587 86.868,15.275 85.03,13.437 ccw(c85.172,13.296) 85.012,13.416 ccw(c85.172,13.296) 84.972,13.296 84.972,11.268 cw(c84.772,11.268) 84.914,11.127 84.894,11.107 cw(c84.753,11.249) 84.753,11.049 v1(82.593,11.049) ; 82.455,21.932 83.814,21.932 84.295,21.451 86.828,21.451 87.207,21.072 87.207,20.798 ; 82.455,22.932 84.098,22.932 84.608,22.422 85.969,22.422 ; 82.455,23.432 84.264,23.432 84.733,22.963 87.098,22.963 87.63,23.495 87.63,28.956 87.238,29.348 87.238,29.774 ; 82.455,23.932 85.304,23.932 85.614,23.622 85.725,23.622 ; 82.455,24.432 86.202,24.432 86.885,23.749 ; 82.455,24.932 86.844,24.932 86.897,24.878 ; 82.455,25.432 82.465,25.442 83.15,25.442 83.161,25.453 86.039,25.453 86.472,25.886 86.809,25.886 86.868,25.946 ; 82.455,25.932 85.876,25.932 86.868,26.924 86.868,27.559 ; 82.455,26.432 82.465,26.422 83.15,26.422 83.161,26.411 85.386,26.411 85.801,26.826 85.939,26.964 ; 82.455,26.932 82.465,26.942 83.15,26.942 83.161,26.953 83.303,26.953 83.327,26.976 85.018,26.976 86.578,28.536 86.591,28.536 86.757,28.702 86.868,28.702 ; 82.455,27.432 84.531,27.432 84.734,27.635 ; 82.455,27.932 83.685,27.932 83.82,28.067 v1(83.82,28.13) v1@83.82,28.194 ; 82.455,28.932 83.558,28.932 83.709,29.083 v1(83.82,29.083) ; 82.455,29.932 82.465,29.922 84.124,29.922 85.266,28.78 85.52,28.78 85.598,28.702 ; 82.455,30.432 82.465,30.422 84.434,30.422 85.009,29.848 85.52,29.848 85.598,29.769 ; 82.465,19.422 82.465,19.007 84.397,17.074 ; 83.714,12.439 83.714,13.887 ; 86.174,36.567 86.174,38.015 ; 86.622,22.446 87.858,22.446 88.667,23.255 88.667,24.295 ; 86.83,5.26 91.18,5.26 91.18,6.444 ; 87.207,20.148 88.437,20.148 88.708,19.877 88.708,19.335 88.667,19.295 ; 87.238,30.424 87.296,30.366 87.596,30.366 88.667,29.295 ; 88.72,44.021 88.72,45.15 93.07,45.15 ; 88.726,12.45 88.726,13.899 ; 89.916,41.51 89.916,36.761 ccw(c90.116,36.761) 90.116,36.561 90.535,36.561 ; 91.174,36.567 91.174,38.015 ; 91.83,5.26 96.18,5.26 96.18,6.444 ; 93.72,44.021 93.72,45.15 98.07,45.15 ; 93.726,12.45 93.726,13.899 ; 94.667,16.755 95.812,16.755 97.209,16.755 cw(c97.209,16.555) 97.409,16.555 97.409,5.46 cw(c97.209,5.46) 97.209,5.26 96.83,5.26 ; 94.667,21.755 95.812,21.755 95.812,17.405 ; 94.667,26.755 95.812,26.755 95.812,22.405 ; 94.667,31.755 95.812,31.755 95.812,27.405 ; 98.727,12.452 98.727,13.631
  Bottom Layer w0.2: v1(13.251,31.059) 13.771,31.059 cw(c13.77,30.859) 13.97,30.859 13.97,23.323 ccw(c14.17,23.324) 14.028,23.183 15.582,21.629 cw(c15.44,21.488) 15.64,21.488 15.64,10.325 ccw(c15.84,10.325) 15.84,10.125 77.496,10.125 ccw(c77.496,10.325) 77.696,10.325 77.696,16.222 cw(c77.896,16.222) 77.736,16.342 cw(c77.896,16.222) 77.754,16.362 81.638,20.246 ccw(c81.496,20.387) 81.656,20.267 ccw(c81.496,20.387) 81.696,20.387 81.696,28.248 ccw(c81.496,28.248) 81.497,28.448 v1(81.026,28.448) ; v1(13.311,27.432) 13.335,27.408 13.335,23.196 ccw(c13.535,23.197) 13.393,23.056 15.127,21.322 cw(c14.986,21.18) 15.186,21.18 15.186,9.871 ccw(c15.386,9.871) 15.386,9.671 77.953,9.671 ccw(c77.953,9.871) 78.153,9.871 78.153,16.022 cw(c78.353,16.022) 78.193,16.142 cw(c78.353,16.022) 78.211,16.162 82.092,20.044 ccw(c81.95,20.185) 82.11,20.065 ccw(c81.95,20.185) 82.15,20.185 82.15,29.264 ccw(c81.95,29.264) 81.951,29.464 v1(81.026,29.464) ; v1(13.335,17.399) 14.078,17.399 cw(c14.078,17.199) 14.278,17.199 14.278,8.963 ccw(c14.478,8.963) 14.478,8.763 78.885,8.763 ccw(c78.885,8.963) 79.085,8.963 79.085,15.622 cw(c79.285,15.622) 79.125,15.742 cw(c79.285,15.622) 79.143,15.763 82.868,19.488 ccw(c82.404,19.949) 82.879,19.499 82.995,19.622 cw(c83.141,19.485) 83,19.627 ccw(c82.858,19.768) 83.018,19.648 ccw(c82.858,19.768) 83.058,19.768 83.058,27.931 cw(c83.258,27.931) 83.257,28.13 v1(83.82,28.13) ; v1(13.335,21.082) 14.532,21.082 cw(c14.532,20.882) 14.732,20.882 14.732,9.417 ccw(c14.932,9.417) 14.932,9.217 78.419,9.217 ccw(c78.419,9.417) 78.619,9.417 78.619,15.799 cw(c78.819,15.798) 78.659,15.918 cw(c78.819,15.798) 78.677,15.939 82.546,19.808 ccw(c82.404,19.949) 82.564,19.829 ccw(c82.404,19.949) 82.604,19.949 82.604,28.846 cw(c82.804,28.846) 82.797,29.046 v1(83.82,29.083) ; 22.86,18.161 22.86,20.701 22.86,22.914 cw(c23.06,22.914) 23.06,23.114 60.815,23.114 ccw(c60.814,23.314) 61.014,23.314 61.014,28.038 cw(c61.214,28.038) 61.054,28.158 cw(c61.214,28.038) 61.072,28.179 61.214,28.321 63.314,30.421 ccw(c63.173,30.563) 63.333,30.443 ccw(c63.173,30.563) 63.373,30.563 63.373,34.652 cw(c63.573,34.652) 63.573,34.852 85.203,34.852 cw(c85.203,34.652) 85.403,34.652 85.403,30.047 ccw(c85.603,30.047) 85.461,29.906 85.598,29.769 ; 25.4,18.161 25.4,20.701 25.4,22.406 cw(c25.6,22.406) 25.6,22.606 61.269,22.606 ccw(c61.268,22.806) 61.468,22.806 61.468,27.85 cw(c61.668,27.85) 61.508,27.97 cw(c61.668,27.85) 61.526,27.991 62.107,28.571 63.779,30.244 ccw(c63.638,30.386) 63.798,30.266 ccw(c63.638,30.386) 63.838,30.386 63.838,34.198 cw(c64.038,34.198) 64.038,34.398 68.338,34.398 84.739,34.398 cw(c84.739,34.198) 84.939,34.2 cw(c84.739,34.198) 84.939,34.198 84.939,28.902 ccw(c85.139,28.902) 85.139,28.702 85.598,28.702 ; 27.94,18.161 27.94,20.701 ; 43.914,32.107 43.928,32.121 43.928,34.403 43.942,34.417 ; v1(46.025,33.906) 46.045,33.886 46.045,31.834 46.065,31.814 ; 62.872,28.314 62.872,28.298 63.14,28.03 63.156,28.03 64.721,26.465 64.721,23.351 v1(64.643,23.273) ; 64.325,28.258 65.37,27.213 65.37,22.776 v1(65.367,22.773) ; 64.516,33.274 64.516,33.734 cw(c64.716,33.733) 64.716,33.933 70.158,33.933 cw(c70.158,33.733) 70.358,33.733 v1(70.358,31.496) ; v1(80.01,11.127) 80.088,11.049 v1(82.593,11.049)
  other v2: 1269.987,1269.087 1269.987,1269.087 1269.487,1269.987 1269.487,1269.987 1270.487,1269.987 1270.487,1269.987 1269.987,1270.887 1269.987,1270.887

## Polygon pours and split planes (outlines as drawn)
ISO_GND on Bottom Layer "NONET_L-01_P-001" (solid, remove dead copper, pour order 1): 48.154,34.142 49.784,32.512 49.784,29.792 48.126,31.45
ISO_GND on Top Layer "ISO_GND_L01_P000" (solid, remove dead copper, pour order 0): 50.927,25.654 51.435,25.146 51.435,22.098 58.118,22.098 58.127,22.089 58.166,22.128 58.166,25.908 56.388,25.908 55.88,26.416 55.88,33.02 50.07,33.02 48.036,35.054 15.748,35.054 15.748,25.654

## Silkscreen, mask and mechanical layers (free items; w line width, h text height)
Mechanical 1:
  lines w0.254: 15.367,34.29 15.367,26.289 ccw(c16.637,26.289) 16.637,25.019 39.37,25.019 ccw(c39.37,25.4) 39.751,25.4 ccw(c39.37,25.4) 39.37,25.781 17.399,25.781 cw(c17.399,27.051) 16.129,27.051 16.129,33.655 cw(c17.399,33.655) 17.399,34.925 39.243,34.925 ccw(c39.243,35.306) 39.624,35.306 ccw(c39.243,35.306) 39.243,35.687 16.637,35.687 ccw(c16.637,34.417) 15.367,34.417 ; 0,0 100,0 100,50 0,50 0,0

## Text inside footprints (layer, text, board x,y; h text height)
X1: Top Assembly "RJ45" at 169.514,8.657 h1.5 r90
X3: Top Assembly "RJ45" at 142.59,8.657 h1.5 r90